# EAGLE board MCU Board (EAGLE 6.5.0)

Size 83.82 x 77.47 mm. Coordinates in mm from the lower left corner, seen from the top.
Outline: 0,0 83.82,0 83.82,77.47 0,77.47 0,0
Copper layers (1*16): Top 0.035mm / dielectric 1.5mm / Bottom 0.035mm
Design rules "default": minimum track width 10mil, minimum drill 24mil, track to track 8mil, track to pad 8mil, pad to pad 8mil, via to via 8mil, smd to smd 8mil, copper to edge 40mil, drill to drill 8mil, minimum pad ring 10mil, minimum via ring 8mil, stop-mask expansion 4mil, vias tented up to drill 0mil, thermal gap 10mil

## Footprints (pad centres in the part's own frame; a part is rotated, then mirrored left to right if it is on the bottom)
SOT223 = smd 1.219 x 2.235: 1 -2.311,-3.099; 2 0,-3.099; 3 2.311,-3.099 | smd 3.6 x 2.2: 4 0,3.099
PANASONIC_D = smd 3 x 1.4: + 2.4,0; - -2.4,0
1206 = smd 1.6 x 1.8: 1 -1.4,0; 2 1.4,0
0805 = smd 0.8 x 1.2: 1 -0.9,0; 2 0.9,0
POWER_JACK_PTH = drill 2.997 pad 4.318: GND 0,7.7; GNDBREAK 4.7,10.7; PWR 0,13.7
2X3 = drill 1.016 pad 1.88 octagon: 1 0,0; 2 0,2.54; 3 2.54,0; 4 2.54,2.54; 5 5.08,0; 6 5.08,2.54
LCD-16X2_NOSILK = drill 1.016 pad 1.88 square: 1 -32,15.5 | drill 1.016 pad 1.88: 2 -29.46,15.5; 3 -26.92,15.5; 4 -24.38,15.5; 5 -21.84,15.5; 6 -19.3,15.5; 7 -16.76,15.5; 8 -14.22,15.5; 9 -11.68,15.5; 10 -9.14,15.5; 11 -6.6,15.5; 12 -4.06,15.5; 13 -1.52,15.5; 14 1.02,15.5; 15 3.56,15.5; 16 6.1,15.5 | hole 2.8: -37.5,15.5; -37.5,-15.5; 37.5,15.5; 37.5,-15.5
TQFP44 = smd 1.5 x 0.5: 1 -5.8,4; 2 -5.8,3.2; 3 -5.8,2.4; 4 -5.8,1.6; 5 -5.8,0.8; 6 -5.8,0; 7 -5.8,-0.8; 8 -5.8,-1.6; 9 -5.8,-2.4; 10 -5.8,-3.2; 11 -5.8,-4; 23 5.8,-4; 24 5.8,-3.2; 25 5.8,-2.4; 26 5.8,-1.6; 27 5.8,-0.8; 28 5.8,0; 29 5.8,0.8; 30 5.8,1.6; 31 5.8,2.4; 32 5.8,3.2; 33 5.8,4 | smd 0.5 x 1.5: 12 -4,-5.8; 13 -3.2,-5.8; 14 -2.4,-5.8; 15 -1.6,-5.8; 16 -0.8,-5.8; 17 0,-5.8; 18 0.8,-5.8; 19 1.6,-5.8; 20 2.4,-5.8; 21 3.2,-5.8; 22 4,-5.8; 34 4,5.8; 35 3.2,5.8; 36 2.4,5.8; 37 1.6,5.8; 38 0.8,5.8; 39 0,5.8; 40 -0.8,5.8; 41 -1.6,5.8; 42 -2.4,5.8; 43 -3.2,5.8; 44 -4,5.8
XBEE-SILK = drill 0.8 pad 1.524: 1 -11,20; 2 -11,18; 3 -11,16; 4 -11,14; 5 -11,12; 6 -11,10; 7 -11,8; 8 -11,6; 9 -11,4; 10 -11,2; 11 11,2; 12 11,4; 13 11,6; 14 11,8; 15 11,10; 16 11,12; 17 11,14; 18 11,16; 19 11,18; 20 11,20
HC49US = drill 0.7 pad 1.651: 1 -2.54,0; 2 2.54,0

## Placement (x,y rotation side)
3.3V  POWERIC223  [SOT223]  17.78,62.23 0 top
5V  POWERIC223  [SOT223]  59.69,62.23 0 top
C1  100uF  [PANASONIC_D]  54.61,50.8 180 top
C2  100uF  [PANASONIC_D]  12.7,50.8 180 top
C3  10uF  [1206]  21.59,50.8 90 top
C4  10uF  [1206]  63.5,50.8 90 top
C5  [0805]  64.77,33.02 90 top
C6  [0805]  59.69,33.02 90 top
J1  POWER_JACKPTH  [POWER_JACK_PTH]  86.36,59.69 90 top
J2  AVR_SPI_PRG_6PTH  [2X3]  76.2,36.83 270 top
U1  LCD-16X2NOSILK  [LCD-16X2_NOSILK]  41.91,58.42 0 top
U$1  ATMEGA1284  [TQFP44]  62.23,17.78 270 top
U$4  XBEE-1B2  [XBEE-SILK]  15.24,3.81 0 top
Y1  [HC49US]  62.23,38.1 0 top

## Library data of the parts
3.3V 5V U$1 = NU STEM
C1-C6 = SparkFun-Capacitors
J1 J2 = SparkFun-Connectors
U1 = SparkFun-Displays
U$4 = SparkFun-RF
Y1 = SparkFun-FreqCtrl

## Nets
3.3V: 3.3V.3 C3.2 U$4.1
5V: 5V.3 C4.2 J2.2 U$1.5 U$1.17 U$1.38
A: U1.15
DIN: U$1.9 U$4.3
DOUT: U$1.10 U$4.2
GND: 3.3V.2 3.3V.4 5V.2 5V.4 C1.- C2.- C3.1 C4.1 C5.1 C6.1 J1.GND J2.6 U$1.6 U$1.18 U$1.28 U$1.39 U$4.10
K: U1.16
MISO: J2.1 U$1.2
MOSI: J2.4 U$1.1
N$2: C5.2 U$1.7 Y1.2
N$3: C6.2 U$1.8 Y1.1
PWR: 3.3V.1 5V.1 C1.+ C2.+ J1.PWR
RESET: J2.5 U$1.4
SCK: J2.3 U$1.3
VDD: U1.2
VSS: U1.1

## Tracks (layer width: path | path; a pad name or v marks a point on that pad's centre or on a via)
3.3V  (2 unrouted)
5V  (5 unrouted)
DIN  (1 unrouted)
DOUT  (1 unrouted)
GND  (16 unrouted)
MISO  (1 unrouted)
MOSI  (1 unrouted)
N$2  (2 unrouted)
N$3  (2 unrouted)
PWR  (4 unrouted)
RESET  (1 unrouted)
SCK  (1 unrouted)